# Altium PCB WS_LORA.PcbDoc (part 1 of 2)
Units mm, origin at the board's own origin, x right, y up, seen from the top; angles counter-clockwise.
Board outline 77.7 x 51.7 mm, 2 copper layers (Top Layer, Top, Bottom Layer, Bottom), stack 1.571 mm thick; 79 components, 51 nets, 236 pads, 108 vias.
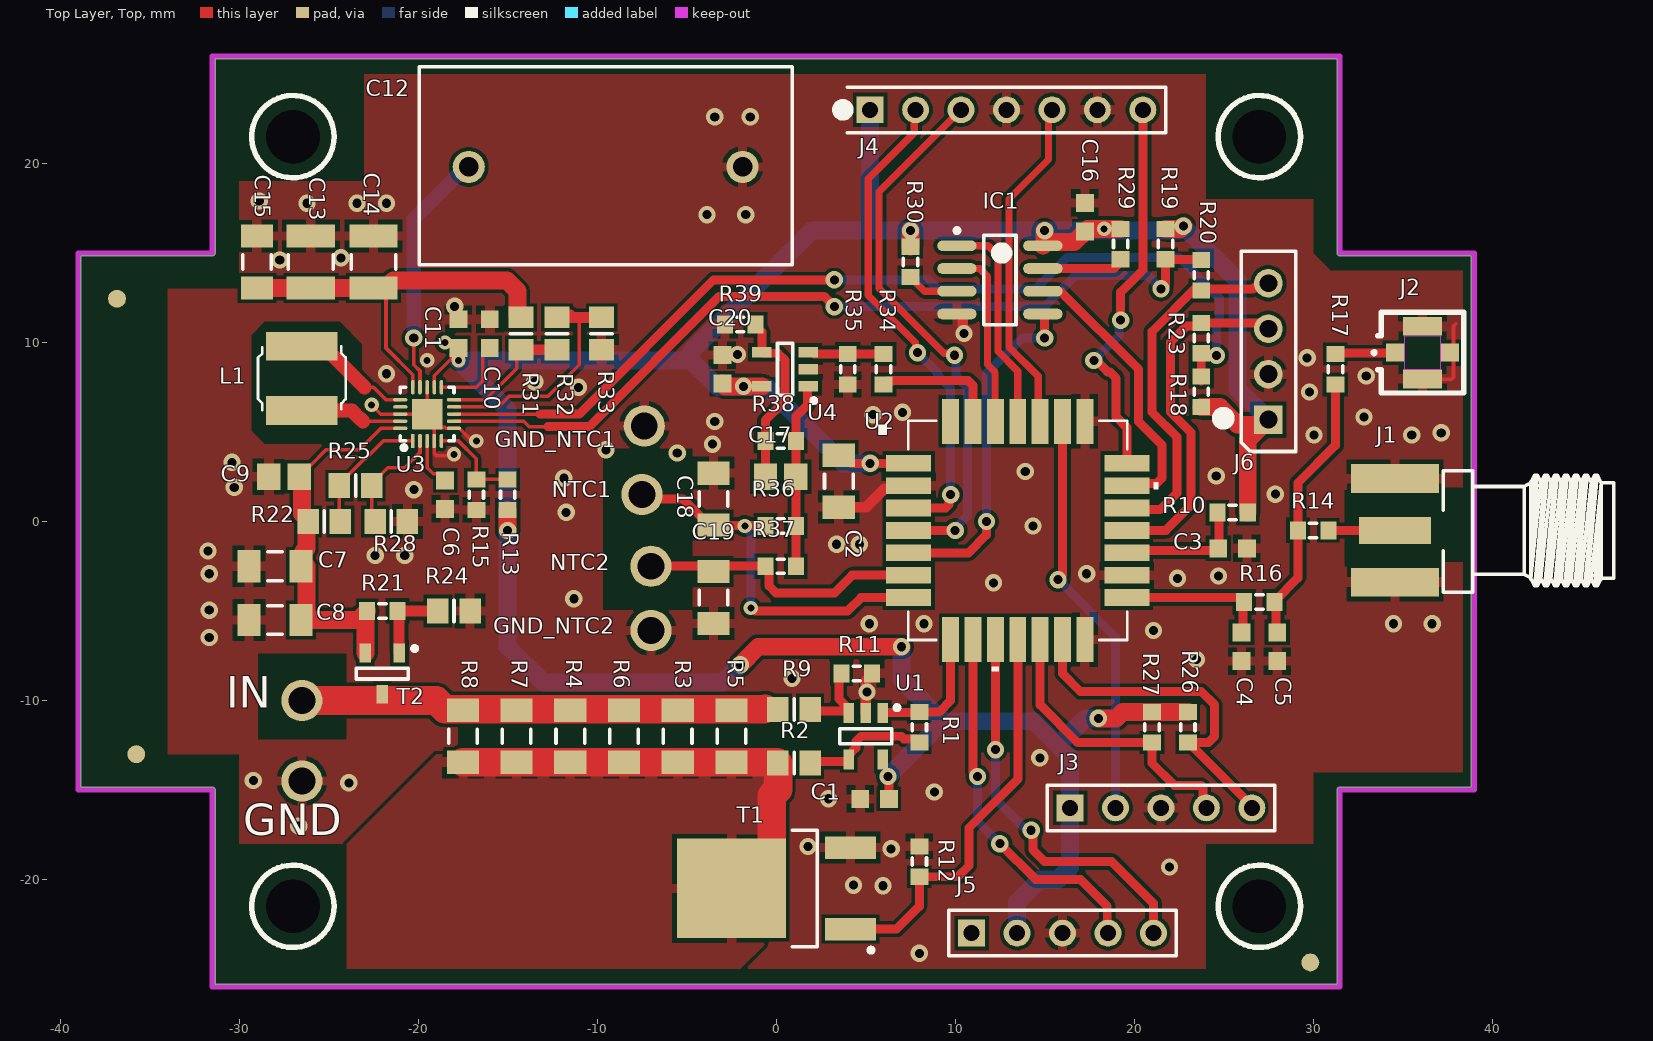
[diagram p0: Top Layer, Top view]
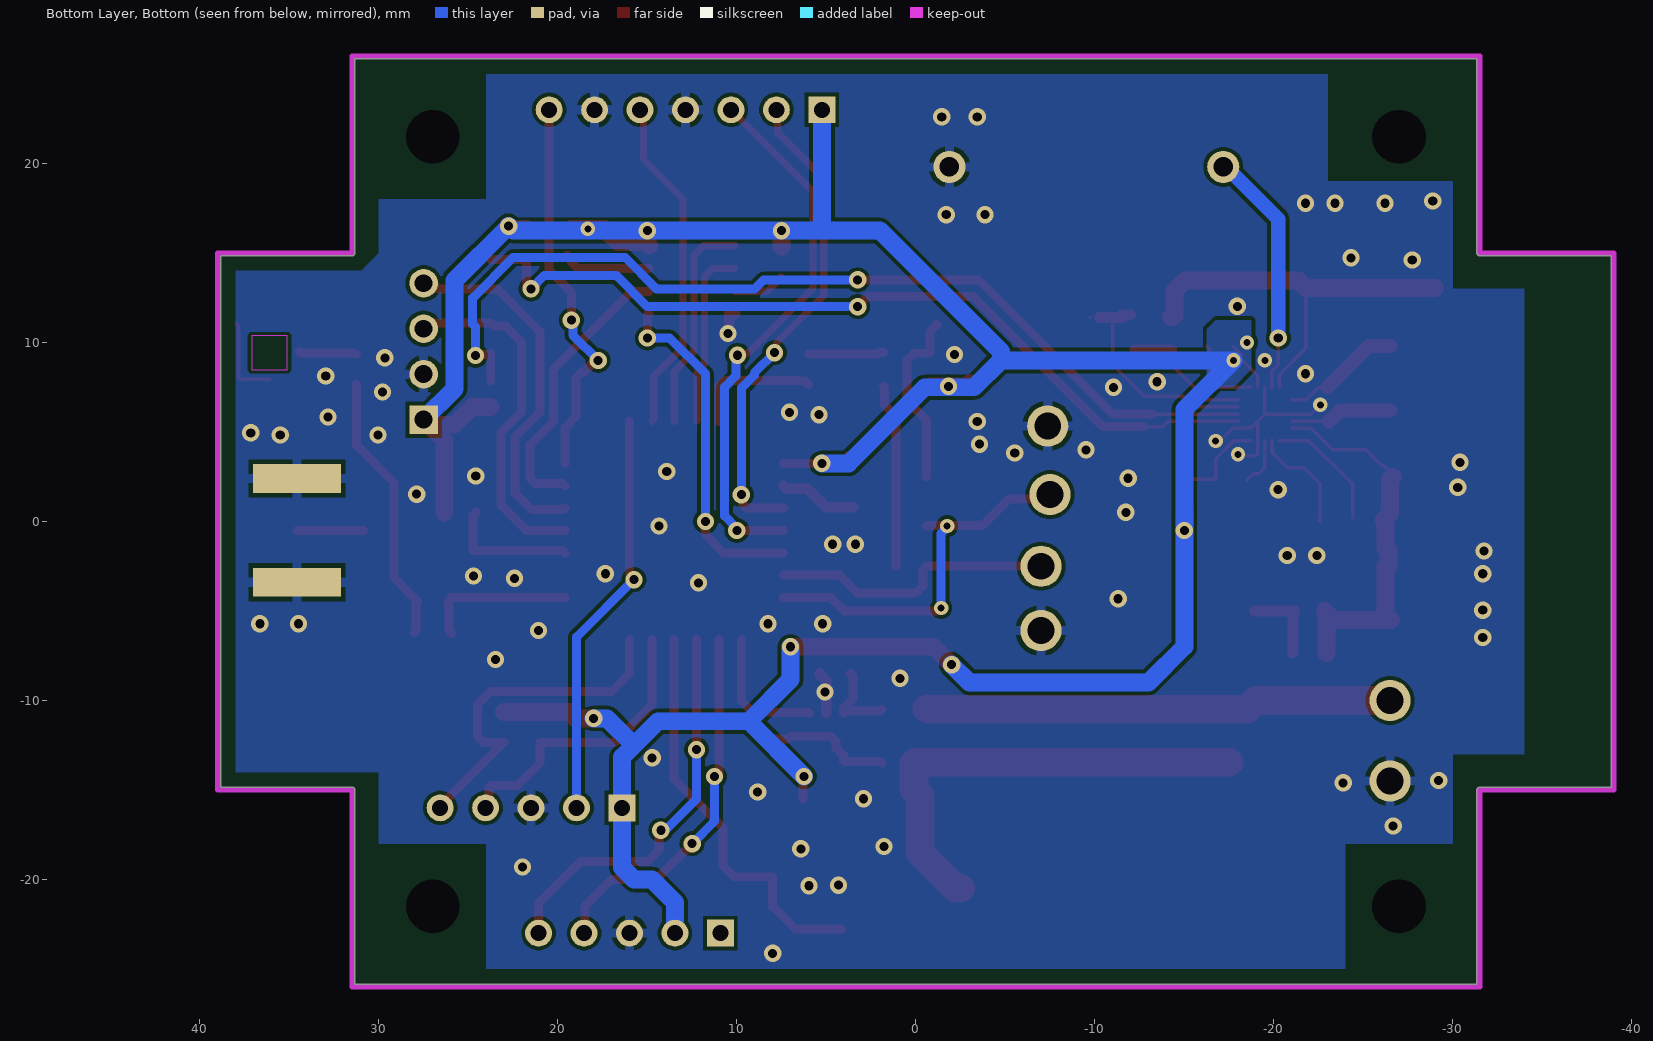
[diagram p1: Bottom Layer, Bottom view, seen from below]

## Layer stack, top to bottom
Top Solder, Top Mask: solder mask 0.0102, Solder Resist, Dk 3.5
Top Layer, Top: signal copper 0.0356
Dielectric 1: dielectric 1.5, FR-4, Dk 4.8
Bottom Layer, Bottom: signal copper 0.0356
Bottom Solder, Bot Mask: solder mask 0.0102, Solder Resist, Dk 3.5

## Board outline
-31.5,-14.85 cw(c-31.5,-15) -31.35,-15 -31.35,-25.85 31.35,-25.85 31.35,-15 cw(c31.5,-15) 31.5,-14.85 38.85,-14.85 38.85,14.85 31.5,14.85 cw(c31.5,15) 31.35,15 31.35,25.85 -31.35,25.85 -31.35,15 cw(c-31.5,15) -31.5,14.85 -38.85,14.85 -38.85,-14.85

## Design rules (kind name [scope] priority, off if disabled: settings)
Clearance [All] p1: gap=0.2 ignorepadtopadclearanceinfootprint=FALSE
PlaneClearance [All] p1: clearance=0.254
PolygonConnect [All] p1: thpad.connectstyle=Relief thpad.reliefconductorwidth=0.54 thpad.reliefentries=4 thpad.polygonreliefangle="90 Angle" thpad.airgapwidth=0.254 smdpad.connectstyle=Relief smdpad.reliefconductorwidth=0.54 smdpad.reliefentries=4 smdpad.polygonreliefangle="90 Angle" smdpad.airgapwidth=0.254 via.connectstyle=Direct via.reliefconductorwidth=0.254 via.reliefentries=4 via.polygonreliefangle="90 Angle" via.airgapwidth=0.254
RoutingVias [All] p1: holewidth=1 width=1 viastyle="Through Hole" minholewidth=0.35 minwidth=0.8 maxholewidth=0.711 maxwidth=1.27
SilkToSilkClearance [All] p1: silktosilkclearance=0.1
SilkToSolderMaskClearance [IsPad] p1: minsilkscreentomaskgap=0.08 clearancetoexposedcopper=TRUE
SolderMaskExpansion [All] p1: expansion=0.102 istentingtop=FALSE
SupplyNets "Schematic Supply Nets_1" [InNet('3.3V')] p1: voltage=0.000
SupplyNets "Schematic Supply Nets" [InNet('GND')] p2: voltage=0.000
Width [All] p1: maxlimit=7.62 minlimit=0.2 preferedwidth=0.381
27 further rules are at their usual default settings.

## Components (designator, comment, footprint, x,y, rotation, side; value= is the part's Value field where it differs from the comment)
C1 "100nF" CAPC1608N 5.5,-15.5 r0 top
C2 "4.7uF" CAPC3216N 3.5,2.25 r90 top
C3 "100nF" CAPC1608N 25.5,-1.5 r180 top
C4 "N.M" CAPC1608N 26,-7 r90 top
C5 "N.M" CAPC1608N 28,-7 r90 top
C6 "10nF" CAPC1608N -18.5,1.5 r270 top
C7 "4.7uF" CAPC3216N -28,-2.5 r0 top
C8 "4.7uF" CAPC3216N -28,-5.5 r0 top
C9 "N.M." CAPC2012N -27.5,2.5 r0 top
C10 "100nF" CAPC1608N -16,10.5 r270 top
C11 "100nF" CAPC1608N -17.75,10.5 r270 top
C12 "5F" CAPR1530x1050X2050X2800 -9.525,19.812 r0 top
C13 "22uF" CAPC3225N -26,14.5 r270 top
C14 "22uF" CAPC3225N -22.5,14.5 r270 top
C15 "4.7uF" CAPC3216N -29,14.5 r270 top
C16 "100nF" CAPC1608N 17.25,17 r270 top
C17 "N.M." CAPC2012N 0.25,2.5 r0 top
C18 "4.7uF" CAPC3216N -3.5,1.25 r270 top
C19 "4.7uF" CAPC3216N -3.5,-4.25 r90 top
C20 "100nF" CAPC1608N -3,8.5 r270 top
GND "" PIN_1.5MM_HOLE -26.5,-14.5 r0 top
GND_NTC1 "" PIN_1.5MM_HOLE -7.366,5.334 r0 top
GND_NTC2 "" PIN_1.5MM_HOLE -6.985,-6.096 r0 top
IC1 "W25Q64JVSSIQ" SOIC127P600-8N 12.5,13.5 r0 top
IN "" PIN_1.5MM_HOLE -26.5,-10 r0 top
J1 "SMA JACJK_EDGE_female" "Adam Tech_RF2-143-T-17-50-G" 36,-0.5 r180 top
J2 "U.FL-JACK_male" LINX_CONMHF1-SMD-T 36.112,9.431 r90 top
J3 "HEADER 1X5" HDR1X5 21.5,-16 r0 top
J4 "HEADER 1X7" HDR1X7 5.25,23 r0 top
J5 "HEADER 1X5" HDR1X5 16,-23 r0 top
J6 "Header Female" HARWIN_M20-7820442 27.5,9.5 r90 top
L1 "22uH" IND_Taiyo_NRS5024 -26.5,8 r90 top
NTC1 "" PIN_1.5MM_HOLE -7.5,1.5 r0 top
NTC2 "" PIN_1.5MM_HOLE -7,-2.5 r0 top
R1 "49K9" RESC1608N(0603) 8,-11.5 r90 top
R2 "4K99" RESC2012N(0805) 1,-13.5 r0 top
R3 "1R" RESC3216N(1206) -5.5,-12 r270 top
R4 "1R" RESC3216N(1206) -11.5,-12 r270 top
R5 "1R" RESC3216N(1206) -2.5,-12 r270 top
R6 "1R" RESC3216N(1206) -8.5,-12 r270 top
R7 "1R" RESC3216N(1206) -14.5,-12 r270 top
R8 "1R" RESC3216N(1206) -17.5,-12 r270 top
R9 "4K99" RESC2012N(0805) 1,-10.5 r0 top
R10 "N.M." RESC1608N(0603) 25.5,0.5 r0 top
R11 "49K9" RESC1608N(0603) 4.5,-8.5 r180 top
R12 "N.M." RESC1608N(0603) 8,-19 r270 top
R13 "N.M." RESC1608N(0603) -15,1.5 r270 top
R14 "0R" RESC1608N(0603) 30,-0.5 r0 top
R15 "N.M." RESC1608N(0603) -16.75,1.5 r90 top
R16 "0R" RESC1608N(0603) 27,-4.5 r0 top
R17 "N.M." RESC1608N(0603) 31.25,8.5 r90 top
R18 "N.M." RESC1608N(0603) 23.75,7.25 r270 top
R19 "N.M." RESC1608N(0603) 21.75,15.5 r90 top
R20 "0R" RESC1608N(0603) 23.75,13.75 r270 top
R21 "N.M." RESC1608N(0603) -22,-5 r180 top
R22 "10M" RESC2012N(0805) -25.25,0 r180 top
R23 "0R" RESC1608N(0603) 23.75,10.25 r90 top
R24 "4K99" RESC2012N(0805) -18,-5 r180 top
R25 "1M" RESC2012N(0805) -23.5,2 r180 top
R26 "N.M." RESC1608N(0603) 23,-11.5 r90 top
R27 "N.M." RESC1608N(0603) 21,-11.5 r90 top
R28 "5M6" RESC2012N(0805) -21.5,0 r180 top
R29 "N.M." RESC1608N(0603) 19.25,15.5 r90 top
R30 "N.M." RESC1608N(0603) 7.5,14.5 r90 top
R31 "6M2" RESC2012N(0805) -14.25,10.5 r90 top
R32 "499K" RESC2012N(0805) -12.25,10.5 r270 top
R33 "2M7" RESC2012N(0805) -9.75,10.5 r90 top
R34 "49K9" RESC1608N(0603) 6,8.5 r270 top
R35 "49K9" RESC1608N(0603) 4,8.5 r90 top
R36 "N.M." RESC1608N(0603) 0.25,-0.25 r0 top
R37 "N.M." RESC1608N(0603) 0.25,-2.5 r0 top
R38 "49K9" RESC1608N(0603) 0.25,4.5 r0 top
R39 "49K9" RESC1608N(0603) -2,11 r0 top
T1 "IRLR8726PBF" TO228P991X239-3N-R546X521 0,-20.5 r180 top
T2 "AP2311GN-HF-3TR" SOT95P240X130-3N -22,-8.5 r270 top
U1 "TLV333IDBVR" SOT95P280X145-5N 5,-12 r270 top
U2 "114993121" QFN_90687_SEE-L 13.5,-0.5 r0 top
U3 "SPV1050TTR" QFN40P300X300X100-21N -19.5,6 r90 top
U4 "MCP6071T-E/OT" SOT95P280X145-5N 0.5,8.5 r180 top

## Footprints (in the part's own frame and the unit in brackets; to place one, negate y for a bottom-side part, rotate by r counter-clockwise, add the part's x,y. Pads: shape width x height; smd on the part's side, far side on the other; paste and mask are expansions set on the pad)
"Adam Tech_RF2-143-T-17-50-G" [mm] "SMA End Launch Jack for 1.58mm PCB, 50 Ohm, Flat Tab Contact"
  rect 4x1.5 smd: 1(1.425,0)
  rect 4.9x1.6 smd: 2(1.425,2.9) 2(1.425,-2.9)
  rect 4.9x1.6 smd far side: 2(1.425,2.9) 2(1.425,-2.9)
  silkscreen extent -10.81,-3.34 -1.28,3.46, body extent -11.06,-3.18 2.25,3.18, height 3.57
CAPC1608N [mm] "Chip Capacitor, Body 1.6x0.8mm, IPC Medium Density"
  rect 1x1 smd: 1(-0.8,0) 2(0.8,0)
  body extent -0.87,-0.48 0.87,0.48, height 0.85
CAPC2012N [mm] "Chip Capacitor, Body 2.0x1.3mm, IPC Medium Density"
  rect 1.3x1.5 smd: 1(-0.85,0) 2(0.85,0)
  body extent -1.1,-0.72 1.1,0.72, height 1.1
CAPC3216N [mm] "Chip Capacitor, Body 3.2x1.6mm, IPC Medium Density"
  rect 1.3x1.8 smd: 1(-1.45,0) 2(1.45,0)
  silkscreen extent -0.4,-0.8 0.4,0.8, body extent -1.7,-0.9 1.7,0.9, height 1.35
CAPC3225N [mm] "Chip Capacitor, Body 3.2x2.5mm, IPC Medium Density"
  rect 1.3x2.7 smd: 1(-1.45,0) 2(1.45,0)
  silkscreen extent -0.4,-1.25 0.4,1.25, body extent -1.7,-1.35 1.7,1.35, height 1.35
CAPR1530x1050X2050X2800 [mm] "Capacitor Radial, Pin spacing 15.0mm - Body Width 9mm X Body Length 18mm X Body Height 17.5mm"
  round 1.8 hole 1.1: 1(-7.65,0) 2(7.65,0)
  silkscreen extent -10.41,-5.46 10.41,5.59, body extent -10.25,-5.17 10.25,5.33, height 27.5
HARWIN_M20-7820442 [mm] "4-Contacts - Pitch 2.54mm - Single Row  Through Mount Header  Socket Total Height 8.64mm"
  rect 1.6x1.6 hole 1: 1(-3.81,0)
  round 1.6 hole 1: 2(-1.27,0) 3(1.27,0) 4(3.81,0)
  silkscreen extent -5.59,-1.52 5.59,2.65, body extent -5.28,-1.25 5.28,1.25, height 8.5
HDR1X5 [mm]
  rect 1.5x1.5 hole 0.9: 1(-5.08,0)
  round 1.5 hole 0.9: 2(-2.54,0) 3(0,0) 4(2.54,0) 5(5.08,0)
  silkscreen extent -6.35,-1.27 6.35,1.27
HDR1X7 [mm]
  rect 1.5x1.5 hole 0.9: 1(0,0)
  round 1.5 hole 0.9: 2(2.54,0) 3(5.08,0) 4(7.62,0) 5(10.16,0) 6(12.7,0) 7(15.24,0)
  silkscreen extent -1.82,-1.27 16.51,1.27
IND_Taiyo_NRS5024 [mm] "Inductor  NRS5024   Series ±20%, 0.82A, 4.9x4.9x2.4mm"
  rect 1.6x4 smd paste-0.152: 1(-1.8,0) 2(1.8,0)
  silkscreen extent -1.77,-2.45 1.77,2.45, body extent -2.45,-2.45 2.45,2.45, height 2.4
LINX_CONMHF1-SMD-T [mm]
  rect 1x1.05 smd: 1(0,1.525) 4(0,-1.525)
  rect 1.05x2.2 smd: 2(1.475,0) 3(-1.475,0)
  Keep-Out Layer, Board region: 0.95,-1 -0.95,-1 -0.95,1 0.95,1
  Keep-Out Layer, Board region: 0.95,-1 -0.95,-1 -0.95,1 0.95,1
  silkscreen extent -2.25,-2.3 2.25,2.8, body extent -1.5,-1.55 1.5,1.55, height 1.31
PIN_1.5MM_HOLE [mm]
  round 2.3 hole 1.5 paste-2539.97: 1(0,0)
QFN40P300X300X100-21N [mm]
  rect 0.8x0.2 smd mask+0.07: 1(-1.5,0.8)
  oval 0.8x0.2 smd mask+0.07: 2(-1.5,0.4) 3(-1.5,0) 4(-1.5,-0.4) 5(-1.5,-0.8) 11(1.5,-0.8) 12(1.5,-0.4) 13(1.5,0) 14(1.5,0.4) 15(1.5,0.8)
  oval 0.2x0.8 smd mask+0.07: 6(-0.8,-1.5) 7(-0.4,-1.5) 8(0,-1.5) 9(0.4,-1.5) 10(0.8,-1.5) 16(0.8,1.5) 17(0.4,1.5) 18(0,1.5) 19(-0.4,1.5) 20(-0.8,1.5)
  rrect4% 1.7x1.7 smd paste-2 mask+0.07: 21(0,0)
  silkscreen extent -2,-1.5 1.5,1.5, body extent -1.5,-1.5 1.5,1.5, height 1
QFN_90687_SEE-L [mil]
  rect 99x37 smd paste+0 mask+0: 1(-240,147.64) 2(-240,98.43) 3(-240,49.21) 4(-240,0) 5(-240,-49.21) 6(-240,-98.43) 7(-240,-147.64) 15(240,-147.64) 16(240,-98.43) 17(240,-49.21) 18(240,0) 19(240,49.21) 20(240,98.43) 21(240,147.64)
  rect 37x99 smd paste+0 mask+0: 8(-147.64,-240) 9(-98.43,-240) 10(-49.21,-240) 11(0,-240) 12(49.21,-240) 13(98.43,-240) 14(147.64,-240) 22(147.64,240) 23(98.43,240) 24(49.21,240) 25(0,240) 26(-49.21,240) 27(-98.43,240) 28(-147.64,240)
  silkscreen extent -241,-310 310,241, body extent -281,-281 281,281, height 98
RESC1608N(0603) [mm] "Chip Resistor, Body 1.6x0.8mm, IPC Medium Density"
  rect 0.9x1 smd: 1(-0.85,0) 2(0.85,0)
  silkscreen extent -0.2,-0.4 0.2,0.4, body extent -0.85,-0.48 0.85,0.48, height 0.6
RESC2012N(0805) [mm] "Chip Resistor, Body 2.0x1.3mm, IPC Medium Density"
  rect 1.2x1.4 smd: 1(-0.9,0) 2(0.9,0)
  silkscreen extent 0,-0.6 0,0.6, body extent -1.07,-0.7 1.07,0.7, height 0.65
RESC3216N(1206) [mm] "Chip Resistor, Body 3.2x1.6mm, IPC Medium Density"
  rect 1.3x1.8 smd: 1(-1.45,0) 2(1.45,0)
  silkscreen extent -0.4,-0.8 0.4,0.8, body extent -1.68,-0.87 1.68,0.87, height 0.71
SOIC127P600-8N [mm] "SOIC, 8-Leads, Body 4.9x3.9mm, Pitch 1.27mm, IPC Medium Density"
  oval 2.2x0.6 smd: 1(-2.4,1.905) 2(-2.4,0.635) 3(-2.4,-0.635) 4(-2.4,-1.905) 5(2.4,-1.905) 6(2.4,-0.635) 7(2.4,0.635) 8(2.4,1.905)
  silkscreen extent -2.52,-2.5 0.9,2.88, body extent -3.1,-2.5 3.1,2.5, height 1.75
SOT95P240X130-3N [mm] "SOT23 3-Leads, Pitch 0.95mm - Body 1.3x2.9mm, IPC Medium Density"
  rect 1.05x0.65 smd: 1(-1.15,0.95) 2(-1.15,-0.95) 3(1.15,0)
  silkscreen extent -1.52,-1.45 0.3,1.92, body extent -1.25,-1.5 1.25,1.5, height 1.3
SOT95P280X145-5N [mm] "SOT, 0.95mm pitch; 5 pin, 1.60mm W X 2.90mm L X 1.45mm H body, IPC Medium Density"
  rect 1.1x0.6 smd: 1(-1.3,0.95) 2(-1.3,0) 3(-1.3,-0.95) 4(1.3,-0.95) 5(1.3,0.95)
  silkscreen extent -1.72,-1.45 0.43,1.88, body extent -1.4,-1.5 1.4,1.5, height 1.45
TO228P991X239-3N-R546X521 [mm] "TO-252AA DPAK TO, 2.28mm pitch; 2 pin,9.905mm L X 6.095mm W X 2.39mm H body, IPC Medium Density"
  rect 2.85x1.25 smd: 1(-4.15,2.28) 2(-4.15,-2.28)
  rect 6.1x5.55 smd: 3(2.5,0)
  silkscreen extent -5.43,-3.25 -0.9,3.57, body extent -4.99,-3.27 4.95,3.27, height 2.28

## Part data
C1 C3 C10 C11 C16 C20: library part CC0603_100NF_50V_10%_X7R, "Non-polarised capacitor", Case=0603, Comment_Ratings="100nF / 50V", Manufacturer=GENERIC, Manufacturer1 ComponentHeight=0.87mm, Manufacturer1 Example=TDK, Manufacturer1 Part Number=C1608X7R1H104K080AA, Tolerance=±10%, Voltage=50V, Author=V.Shishkov, Component Type=Standard, CreateDate=13/07/2015, Elinvent_Num=33-1002-02, HelpURL=\\IDT-SRV102\Bulgaria\Bulgaria\Altium\Datasheets\mlcc_commercial_general_en.pdf, LatestRevisionDate=13/07/2015, Manufacturer Part Number=CC0603_100NF_50V_10%_X7R, Mounted=Yes, Part Description="SMD Multilayer Chip Ceramic Capacitor", Part Number=CC0603_100NF_50V_10%_X7R, Pin Count=2, SMD=Yes, Socket=No, Status=Preferred, Table="Capacitors SMD", TC=X7R
C2 C7 C8 C15 C18 C19: library part CC1206_4.7UF_50V_10%_X7R, "Non-polarised capacitor", Case=1206, Comment_Ratings="4.7uF / 50V", Manufacturer=GENERIC, Manufacturer1 ComponentHeight=1.60mm, Manufacturer1 Example=TDK, Manufacturer1 Part Number=C3216X7R1H475K160AC, Tolerance=±10%, Voltage=50V, Author=V.Shishkov, Component Type=Standard, CreateDate=13/07/2015, Elinvent_Num=33-1058-04, HelpURL=\\IDT-SRV102\Bulgaria\Altium\Datasheets\mlcc_commercial_general_en.pdf, LatestRevisionDate=13/07/2015, Manufacturer Part Number=CC1206_4.7UF_50V_10%_X7R, Mounted=Yes, Part Description="SMD Multilayer Chip Ceramic Capacitor", Part Number=CC1206_4.7UF_50V_10%_X7R, Pin Count=2, SMD=Yes, Socket=No, Status=Preferred, Table="Capacitors SMD", TC=X7R
C4 C5: library part CC0603_NO-VALUE, "Non-polarised capacitor", Case=0603, Manufacturer=GENERIC, Manufacturer1 ComponentHeight=0.87mm, Author=L.K, Comment_Ratings=N.M, Component Type=Standard, CreateDate=15/03/2016, HelpURL=Undefined, LatestRevisionDate=15/03/2016, Manufacturer Part Number=CC0603_NO-VALUE, Mounted=Yes, Part Description="SMD Multilayer Chip Ceramic Capacitor", Part Number=CC0603_NO-VALUE, Pin Count=2, SMD=Yes, Socket=No, Status=Preferred, Table="Capacitors SMD"
C6: library part CC0603_10NF_50V_10%_X7R, "Non-polarised capacitor", Case=0603, Comment_Ratings="10nF / 50V", Manufacturer=GENERIC, Manufacturer1 ComponentHeight=0.87mm, Manufacturer1 Example=TDK, Manufacturer1 Part Number=C1608X7R1H103K080AA, Tolerance=±10%, Voltage=50V, Author=V.Shishkov, Component Type=Standard, CreateDate=13/07/2015, Elinvent_Num=33-1004-02, HelpURL=\\IDT-SRV102\Bulgaria\Altium\Datasheets\mlcc_commercial_general_en.pdf, LatestRevisionDate=13/07/2015, Manufacturer Part Number=CC0603_10NF_50V_10%_X7R, Mounted=Yes, Part Description="SMD Multilayer Chip Ceramic Capacitor", Part Number=CC0603_10NF_50V_10%_X7R, Pin Count=2, SMD=Yes, Socket=No, Status=Preferred, Table="Capacitors SMD", TC=X7R
C9 C17: library part CC0805_NO-VALUE, "Non-polarised capacitor", Case=0805, Manufacturer=Undefined, Manufacturer1 ComponentHeight=1.35mm, Author=V.Shishkov, Comment_Ratings=N.M., Component Type="Standard (No BOM)", CreateDate=13/07/2015, HelpURL=Undefined, LatestRevisionDate=13/07/2015, Manufacturer Part Number=CC0805_NO-VALUE, Mounted=No, Part Description="Reserved Footprint For 0805(2012) Chip Ceramic Capacitor", Part Number=CC0805_NO-VALUE, Pin Count=2, SMD=Yes, Socket=No, Status=None, Table="Capacitors SMD"
C12: library part CAER_5F_5.5V_0%+30%, "Polarised capacitor", Case="LS15.3 D20.5 x T10.5 x H28", Comment_Ratings="5F / 5.5V", Manufacturer="Abracon LLC", Manufacturer Part Number=ADCM-S05R5SA505RB, Tolerance=0%+30%, Voltage=5.5V, Author=L.Karamfilov, Component Type=Standard, ComponentHeight=28mm, CreateDate=16/01/2025, HelpURL=\\IDT-SRV102\Bulgaria\Altium\Datasheets\ADCM-S05R5S.pdf, LatestRevisionDate=07/03/2012, Mounted=Yes, Part Description="5 F (EDLC) Supercapacitor 5.5 V Radial 160mOhm @ 1kHz", Part Number=CAER_5F_5.5V_0%+30%, Pin Count=2, SMD=No, Socket=No, Status=None, Table="Capacitors THD"
C13 C14: library part CC1210_22UF_16V_10%_X7R, "Non-polarised capacitor", Case=1210, Comment_Ratings="22uF / 16V", Manufacturer=GENERIC, Manufacturer1 ComponentHeight=2.50mm, Manufacturer1 Example=TDK, Manufacturer1 Part Number=C3225X7R1C226K250AC, Manufacturer Part Number=CC1210_22UF_10V_10%_X7R, Tolerance=±10%, Voltage=16V, Author=V.Shishkov, Component Type=Standard, CreateDate=13/07/2015, Elinvent_Num=33-1005-05, HelpURL=\\IDT-SRV102\Bulgaria\Altium\Datasheets\mlcc_commercial_general_en.pdf, LatestRevisionDate=13/07/2015, Mounted=Yes, Part Description="SMD Multilayer Chip Ceramic Capacitor", Part Number=CC1210_22UF_16V_10%_X7R, Pin Count=2, SMD=Yes, Socket=No, Status=Preferred, Table="Capacitors SMD", TC=X7R
GND GND_NTC1 GND_NTC2 IN NTC1 NTC2: library part PAD_1.5mm_HOLE, "Through Hole Pad", Author=L.K, Component Type="Standard(No BOM)", ComponentHeight=0mm, CreateDate=05/12/2017, LatestRevisionDate=05/12/2017, Mounted=No, PackageDescription="PAD-1.5MM HOLE_ 2.3 MM  RING", Part Description="Place for CABLE SOLDER", Part Number=PAD_1.5mm_HOLE, Pin Count=1, SMD=No, Socket=No, Status=None
IC1: "FLASH - NOR Memory IC 64Mbit SPI - Quad I/O 133 MHz 8-SOIC", Case=SOIC8, Manufacturer="Winbond Electronics", Author=L.Karamfilov, Component Type=Standard, ComponentHeight=1.75mm, CreateDate=16/01/2025, Device=W25Q64JVSSIQ, HelpURL="\\IDT-SRV102\Bulgaria\Altium\Datasheets\w25q64jv revj 03272018 plus.pdf", LatestRevisionDate=30/11/2015, Manufacturer Part Number=W25Q64JVSSIQ, Mounted=Yes, PackageDescription="SOIC 8, Pitch 1.27mm - Body 4x5mm, IPC Medium Density", Part Description="FLASH - NOR Memory IC 64Mbit SPI - Quad I/O 133 MHz 8-SOIC", Part Number=W25Q64JVSSIQ, Pin Count=8, SMD=Yes, Socket=No, Table=Logic
J1: library part "Adam Tech_RF2-143-T-17-50-G_SMA", Manufacturer="Adam Tech", Manufacturer Part Number=RF2-143-T-17-50-G, Author=L.KARAMFILOV, Component Type=Standard, ComponentHeight=3.54mm, CreateDate=28/02/2025, Device="SMA JACJK_EDGE_female", Family=RF, HelpURL=\\IDT-SRV102\Bulgaria\Altium\Datasheets\rf2-143-t-17-50-g-data-sheet.pdf, LatestRevisionDate=22/07/2015, Mounted=Yes, Part Description="SMA Connector Jack, Female Socket 50 Ohms Board Edge, End Launch Solder", Part Number="Adam Tech_RF2-143-T-17-50-G_SMA", Pin Count=5, SMD=Yes, Socket=No, Status=None, Table=Miscellaneous
J2: library part "TE Connectivity_CONMHF1-SMD-T_U.FL", Manufacturer="TE Connectivity Linx", Manufacturer Part Number=CONMHF1-SMD-T, Author=L.KARAMFILOV, Component Type=Standard, ComponentHeight=1.25mm, CreateDate=28/02/2025, Device=U.FL-JACK_male, Family=U.FL-Type, HelpURL=\\IDT-SRV102\Bulgaria\Altium\Datasheets\ENG_DS_conmhf1-smd-g-t-ds_A1.pdf, LatestRevisionDate=22/07/2015, Mounted=Yes, Part Description="U.FL (UMCC) Connector Jack, Male Pin 50 Ohms Surface Mount Solder", Part Number="TE Connectivity_CONMHF1-SMD-T_U.FL", Pin Count=4, SMD=Yes, Socket=No, Status=None, Table=Miscellaneous
J3 J5: library part "HEADER 1 X 5_2.54MM", "Connector 5 Male", Manufacturer Part Number="DO NOT MOUNT", Author=L.K, Component Type=Standard, CreateDate=05/04/2016, Device="HEADER 1X5", LatestRevisionDate=05/04/2016, Mounted=No, Part Description="5 Contacts - Pitch 2.54mm", Part Number="HEADER 1 X 5_2.54MM", Pin Count=5, SMD=No, Socket=No, Status=None, Table=Miscellaneous
J4: library part "HEADER 1 X 7_2.54MM", "Connector 7 Male", Manufacturer Part Number="DO NOT MOUNT", Author=L.K, Component Type=Standard, CreateDate=16/06/2022, Device="HEADER 1X7", LatestRevisionDate=05/04/2016, Mounted=No, Part Description="7 Contacts - Pitch 2.54mm", Part Number="HEADER 1 X 7_2.54MM", Pin Count=7, SMD=No, Socket=No, Status=None, Table=Miscellaneous
J6: library part M20-7820442, "Connector 4 Female", Manufacturer=HARWIN, Author=L.KARAMFILOV, Component Type=Standard, ComponentHeight=8.64mm, CreateDate=20/10/2015, Device="Header Female", Elinvent_Num=38-2064-01, Family=M20-782, HelpURL=\\IDT-SRV102\Bulgaria\Altium\Datasheets\M20-782.pdf, LatestRevisionDate=20/10/2015, Manufacturer Part Number=M20-7820442, Mounted=Yes, Part Description="4 Contacts - 	Connector  Receptacle 4 Position 0.100\" (2.54mm) Gold Through ole single row", Part Number=M20-7820442, Pin Count=4, SMD=No, Socket=No, Status=None, Table=Miscellaneous
L1: library part IND_22UH_20%_Taiyo-Yuden_NRS5024T220MMGJV, "Inductor", Case=NRS5024, Comment_Ratings="22uH / 0.82A", Manufacturer="Taiyo Yuden", Manufacturer Part Number=NRS5024T220MMGJV, Power=820mA, Resistance=0.276R, Tolerance=±20%, Author=L.KARAMFILOV, Component Type=Standard, ComponentHeight=3.2mm, CreateDate=07/03/2025, HelpURL=\\IDT-SRV102\Bulgaria\Altium\Datasheets\NRS5024T220MMGJV_SS.pdf, LatestRevisionDate=05/12/2017, Mounted=Yes, Part Description="22 µH Shielded Drum Core, Wirewound Inductor 820 mA 276mOhm Max Nonstandard", Part Number=IND_22UH_20%_Taiyo-Yuden_NRS5024T220MMGJV, Pin Count=2, SMD=Yes, Socket=No, Table="Inductors SMD"
R1 R11 R34 R35 R38 R39: library part R0603_49K9_1%_0.1W_100PPM, "Resistor-1%", Case=0603, Comment_Ratings="49K9 / 0.1W", Manufacturer=GENERIC, Manufacturer1 ComponentHeight=0.55mm, Manufacturer1 Example="YAGEO PHYCOMP", Manufacturer1 Part Number=RC0603FR-0749K9L, Power=0.1W, Tolerance=±1%, Author=L.KARAMFILOV, Component Type=Standard, ComponentHeight=0.45±0.10mm, CreateDate=01/09/2016, HelpURL=\\IDT-SRV102\Bulgaria\Altium\Datasheets\PYu-RC_Group_51_RoHS_L_2.pdf, LatestRevisionDate=01/09/2016, Manufacturer Part Number=R0603_49K9_1%_0.1W_100PPM, Mounted=Yes, Part Description="General Purpose Thick Film Chip Resistor", Part Number=R0603_49K9_1%_0.1W_100PPM, Pin Count=2, SMD=Yes, Socket=No, Status=Preferred, Table="Resistors SMD", TC=±100ppm/°C
R2 R9 R24: library part R0805_4K99_1%_0.125W_100PPM, "Resistor-1%", Case=0805, Comment_Ratings="4K99 / 0.125W", Manufacturer="Vishay Dale", Manufacturer1 ComponentHeight=0.5mm, Manufacturer1 Example=VISHAY, Manufacturer1 Part Number=CRCW08054K99FKEA, Power=0.125W, Tolerance=±1%, Author=L.KARAMFILOV, Component Type=Standard, ComponentHeight=0.50±0.10mm, CreateDate=07/03/2025, HelpURL="\\IDT-SRV102\Bulgaria\Altium\Datasheets\dcrcwe3 (1).pdf", LatestRevisionDate=19/12/2016, Manufacturer Part Number=R0805_4K99_1%_0.125W_100PPM, Mounted=Yes, Part Description="General Purpose Thick Film Chip Resistor", Part Number=R0805_4K99_1%_0.125W_100PPM, Pin Count=2, SMD=Yes, Socket=No, Status=Preferred, Table="Resistors SMD", TC=±100ppm/°C
R3 R4 R5 R6 R7 R8: library part R1206_1R_0.5%_0.52W_25PPM, "Resistor-0.1%", Case=1206, Comment_Ratings="1R / 0.52W / 25PPM", Manufacturer=YAGEO, Manufacturer1 ComponentHeight=TNPW12061R00DEEA, Manufacturer1 Example=VISHAY, Manufacturer1 Part Number="RES 1 OHM 0.5% 0.52W 1206", Power=0.25W, Tolerance=±0.5%, Author=L.KARAMFILOV, Component Type=Standard, ComponentHeight=0.55±0.10mm, CreateDate=29/07/2015, HelpURL=\\IDT-SRV102\Bulgaria\Altium\Datasheets\recsoldpaddims-drabeyresfus.pdf, LatestRevisionDate=29/07/2015, Manufacturer Part Number=TNPW12061R00DEEA, Mounted=Yes, Part Description="1 Ohms ±0.5% 0.52W Chip Resistor 1206 (3216 Metric) Anti-Sulfur, Automotive AEC-Q200, Moisture Resistant Thin Film", Part Number=R1206_1R_0.5%_0.52W_25PPM, Pin Count=2, SMD=Yes, Socket=No, Status=Preferred, Table="Resistors SMD", TC=±25ppm/°C
R10 R12 R13 R15 R17 R18 R19 R21 R26 R27 R29 R30 R36 R37: library part R0603_NO-VALUE, "Resistor", Case=0603, Manufacturer=Undefined, Author=L.KARAMFILOV, Comment_Ratings=N.M., Component Type="Standard (No BOM)", ComponentHeight=0.45±0.10mm, CreateDate=10/07/2015, HelpURL=\\IDT-SRV102\Bulgaria\Altium\Datasheets\.pdf, LatestRevisionDate=10/07/2015, Manufacturer1 ComponentHeight=Undefined, Manufacturer1 Example=Undefined, Manufacturer1 Part Number=Undefined, Manufacturer Part Number=R0603_NO-VALUE, Mounted=No, Part Description="Reserved Footprint For a 0603 (1608) Chip Resistor", Part Number=R0603_NO-VALUE, Pin Count=2, SMD=Yes, Socket=No, Status=None, Table="Resistors SMD"
R14 R16 R20 R23: library part R0603_0R_JUMPER, "Resistor", Case=0603, Comment_Ratings="0R / 1A Max", Manufacturer=GENERIC, Manufacturer1 ComponentHeight=0.55mm, Manufacturer1 Example="YAGEO PHYCOMP", Manufacturer1 Part Number=RC0603JR-070RL, Author=L.KARAMFILOV, Component Type=Standard, ComponentHeight=0.45±0.10mm, CreateDate=10/07/2015, Elinvent_Num=36-1001-03, HelpURL=\\IDT-SRV102\Bulgaria\Altium\Datasheets\RC0603_V5.pdf, LatestRevisionDate=10/07/2015, Manufacturer Part Number=R0603_0R_JUMPER, Mounted=Yes, Part Description="1A (0.05R Max DC Resistance) Zero Ohm Jumper", Part Number=R0603_0R_JUMPER, Pin Count=2, SMD=Yes, Socket=No, Status=Preferred, Table="Resistors SMD"
R22: library part R0805_10M_1%_0.125W_100PPM, "Resistor-1%", Case=0805, Comment_Ratings="10M / 0.125W", Manufacturer="Vishay Dale", Manufacturer1 ComponentHeight=0.5mm, Manufacturer1 Example=VISHAY, Manufacturer1 Part Number=CRCW080510M00FKEA, Power=0.125W, Tolerance=±1%, Author=L.KARAMFILOV, Component Type=Standard, ComponentHeight=0.50±0.10mm, CreateDate=07/03/2025, HelpURL="\\IDT-SRV102\Bulgaria\Altium\Datasheets\dcrcwe3 (1).pdf", LatestRevisionDate=19/12/2016, Manufacturer Part Number=R0805_10M_1%_0.125W_100PPM, Mounted=Yes, Part Description="General Purpose Thick Film Chip Resistor", Part Number=R0805_10M_1%_0.125W_100PPM, Pin Count=2, SMD=Yes, Socket=No, Status=Preferred, Table="Resistors SMD", TC=±100ppm/°C
R25: library part R0805_1M_1%_0.125W_100PPM, "Resistor-1%", Case=0805, Comment_Ratings="1M / 0.125W", Manufacturer="Vishay Dale", Manufacturer1 ComponentHeight=0.5mm, Manufacturer1 Example=VISHAY, Manufacturer1 Part Number=CRCW08051M00FKEA, Power=0.125W, Tolerance=±1%, Author=L.KARAMFILOV, Component Type=Standard, ComponentHeight=0.50±0.10mm, CreateDate=07/03/2025, HelpURL="\\IDT-SRV102\Bulgaria\Altium\Datasheets\dcrcwe3 (1).pdf", LatestRevisionDate=19/12/2016, Manufacturer Part Number=R0805_1M_1%_0.125W_100PPM, Mounted=Yes, Part Description="General Purpose Thick Film Chip Resistor", Part Number=R0805_1M_1%_0.125W_100PPM, Pin Count=2, SMD=Yes, Socket=No, Status=Preferred, Table="Resistors SMD", TC=±100ppm/°C
R28: library part R0805_5M6_1%_0.125W_100PPM, "Resistor-1%", Case=0805, Comment_Ratings="5M6 / 0.125W", Manufacturer="Vishay Dale", Manufacturer1 ComponentHeight=0.5mm, Manufacturer1 Example=VISHAY, Manufacturer1 Part Number=CRCW08055M60FKEA, Power=0.125W, Tolerance=±1%, Author=L.KARAMFILOV, Component Type=Standard, ComponentHeight=0.50±0.10mm, CreateDate=07/03/2025, HelpURL="\\IDT-SRV102\Bulgaria\Altium\Datasheets\dcrcwe3 (1).pdf", LatestRevisionDate=19/12/2016, Manufacturer Part Number=R0805_5M6_1%_0.125W_100PPM, Mounted=Yes, Part Description="General Purpose Thick Film Chip Resistor", Part Number=R0805_5M6_1%_0.125W_100PPM, Pin Count=2, SMD=Yes, Socket=No, Status=Preferred, Table="Resistors SMD", TC=±100ppm/°C
R31: library part R0805_6M2_1%_0.125W_100PPM, "Resistor-1%", Case=0805, Comment_Ratings="6M2 / 0.125W", Manufacturer="Vishay Dale", Manufacturer1 ComponentHeight=0.5mm, Manufacturer1 Example=VISHAY, Manufacturer1 Part Number=CRCW08056M20FKEA, Power=0.125W, Tolerance=±1%, Author=L.KARAMFILOV, Component Type=Standard, ComponentHeight=0.50±0.10mm, CreateDate=07/03/2025, HelpURL="\\IDT-SRV102\Bulgaria\Altium\Datasheets\dcrcwe3 (1).pdf", LatestRevisionDate=19/12/2016, Manufacturer Part Number=R0805_6M2_1%_0.125W_100PPM, Mounted=Yes, Part Description="General Purpose Thick Film Chip Resistor", Part Number=R0805_6M2_1%_0.125W_100PPM, Pin Count=2, SMD=Yes, Socket=No, Status=Preferred, Table="Resistors SMD", TC=±100ppm/°C
R32: library part R0805_499K_1%_0.125W_100PPM, "Resistor-1%", Case=0805, Comment_Ratings="499K / 0.125W", Manufacturer=GENERIC, Manufacturer1 ComponentHeight=0.65mm, Manufacturer1 Example="YAGEO PHYCOMP", Manufacturer1 Part Number=RC0805FR-07499KL, Power=0.125W, Tolerance=±1%, Author=L.KARAMFILOV, Component Type=Standard, ComponentHeight=0.55±0.10mm, CreateDate=09/05/2017, Elinvent_Num=36-1101-05, HelpURL=\\IDT-SRV102\Bulgaria\Altium\Datasheets\PYu-R_INT-thick_7.pdf, LatestRevisionDate=09/05/2017, Manufacturer Part Number=R0805_499K_1%_0.125W_100PPM, Mounted=Yes, Part Description="Commercial Thin Film Resistor, Surface Mount Chip", Part Number=R0805_499K_1%_0.125W_100PPM, Pin Count=2, SMD=Yes, Socket=No, Status=Preferred, Table="Resistors SMD", TC=±100ppm/°C
R33: library part R0805_2M7_1%_0.125W_100PPM, "Resistor-1%", Case=0805, Comment_Ratings="2M7 / 0.125W", Manufacturer="Vishay Dale", Manufacturer1 ComponentHeight=0.5mm, Manufacturer1 Example=VISHAY, Manufacturer1 Part Number=CRCW08052M70FKEA, Power=0.125W, Tolerance=±1%, Author=L.KARAMFILOV, Component Type=Standard, ComponentHeight=0.50±0.10mm, CreateDate=07/03/2025, HelpURL="\\IDT-SRV102\Bulgaria\Altium\Datasheets\dcrcwe3 (1).pdf", LatestRevisionDate=19/12/2016, Manufacturer Part Number=R0805_2M7_1%_0.125W_100PPM, Mounted=Yes, Part Description="General Purpose Thick Film Chip Resistor", Part Number=R0805_2M7_1%_0.125W_100PPM, Pin Count=2, SMD=Yes, Socket=No, Status=Preferred, Table="Resistors SMD", TC=±100ppm/°C
T1: "N-channel FET transistor in SOT-23", Case=TO252-AA, Comment_Ratings="Vds=30V / Id=86A", Manufacturer="INFINEON TECHNOLOGIES", Author=L.Karmafilov, Component Type=Standard, ComponentHeight=2.39mm, CreateDate=19/01/2017, Device=IRLR8726PBF, Elinvent_Num=40-1070-00, HelpURL=\\IDT-SRV102\Bulgaria\Altium\Datasheets\irlr8726pbf.pdf, LatestRevisionDate=19/01/2017, Manufacturer Part Number=IRLR8726PBF, Mounted=Yes, PackageDescription="TO-252AA DPAK TO, 2.28mm pitch; 2 pin,9.905mm L X 6.095mm W X 2.39mm H body, IPC Medium Density", Part Description="MOSFET N-CH 30V 86A DPAK", Part Number=IRLR8726PBF, Pin Count=3, SMD=Yes, Socket=No, Table=Transistors
T2: "P-channel FET transistor in SOT-23", Case=SOT23-2, Comment_Ratings="Vds=60V / Id=1.8A", Manufacturer="ADVANCED POWER ELECTR. CO", Author=L.Karmafilov, Component Type=Standard, ComponentHeight=1.11mm, CreateDate=09/03/2025, Device=AP2311GN-HF-3TR, HelpURL=\\IDT-SRV102\Bulgaria\Altium\Datasheets\AP2311GN-3.pdf, LatestRevisionDate=22/12/2015, Manufacturer Part Number=AP2311GN-HF-3TR, Mounted=Yes, PackageDescription="SOT23 3-Leads, Pitch 0.95mm - Body 1.3x2.9mm, IPC Medium Density", Part Description="PMOS 60V 1.8A 1.38W 250mOhm/10V; 300mOhm/4.5V", Part Number=AP2311GN-HF-3TR, Pin Count=3, SMD=Yes, Socket=No, Table=Transistors
U1: "Single Op Amp in SOT23/5", Case=SOT23-5, Manufacturer="TEXAS INSTRUMENTS", Author=L.Karamfilov, Component Type=Standard, ComponentHeight=1.75mm, CreateDate=04/03/2025, Device=TLV333IDBVR, HelpURL=\\IDT-SRV102\Bulgaria\Altium\Datasheets\tlv333.pdf, LatestRevisionDate=19/05/2010, Manufacturer Part Number=TLV333IDBVR, Mounted=Yes, PackageDescription="SOT23-5, 0.95mm pitch; 5 pin, 1.60mm W X 2.90mm L X 1.45mm H body, IPC Medium", Part Description="Zero-Drift Amplifier 1 Circuit Rail-to-Rail SOT-23-5", Part Number=TLV333IDBVR, Pin Count=5, SMD=Yes, Socket=No, Table="Operational Amplifiers"
U2: library part 114993121_RF_SEED, "WIO-E5-LE WIRELESS MODULE (TAPE)", Manufacturer="Seeed Technology Co., Ltd", Mfr_Name=BeagleBoard, Author=L.Karamfilov, Component Type=Standard, ComponentHeight=2.5mm, CreateDate=16/01/2025, Device=114993121, HelpURL="\\IDT-SRV102\Bulgaria\Altium\Datasheets\Wio-E5-LE module datasheet_v1.0.pdf", LatestRevisionDate=07/11/2017, Manufacturer Part Number=114993121, Mounted=Yes, PackageDescription="28-SMD Module", Part Description="General ISM < 1GHz LoRaWAN Transceiver Module 868MHz, 915MHz Antenna Not Included Surface Mount", Part Number=114993121_RF_SEED, Pin Count=28, RefDes=RefDes, SMD=Yes, Socket=No, Table="PCB Modules", Type=Type
U3: "Charger IC Multi-Chemistry 20-VFQFPN (3x3)", Case=20-VFQFN, Manufacturer=STMicroelectronics, Package="VFQFN-20 STMicroelectronics", Author=L.Karamfilov, Check_prices=https://www.snapeda.com/parts/SPV1050TTR/STMicroelectronics/view-part/?ref=eda, Component Type=Standard, ComponentHeight=0.75mm, CreateDate=16/01/2025, Device=SPV1050TTR, HelpURL=\\IDT-SRV102\Bulgaria\Altium\Datasheets\en.DM00100984.pdf, LatestRevisionDate=01/06/2018, Manufacturer Part Number=SPV1050TTR, MF=STMicroelectronics, Mounted=Yes, MP=SPV1050TTR, PackageDescription="20-VFQFN Exposed Pad(3mm × 3mm)", Part Description="IC BATT CHG MULTI-CHEM 20VFQFPN", Part Number=SPV1050TTR, Pin Count=21, SMD=Yes, SnapEDA_Link=https://www.snapeda.com/parts/SPV1050TTR/STMicroelectronics/view-part/?ref=snap, Socket=No, Table="Analog & Interface"
U4: "Single Op Amp in SOT23/5", Case=SOT23-5, Manufacturer="Analog Devices", Author=L.Karamfilov, Component Type=Standard, ComponentHeight=1.45mm, CreateDate=29/10/2018, Device=MCP6071T-E/OT, Elinvent_Num=31-5113-00, HelpURL=\\IDT-SRV102\Bulgaria\Altium\Datasheets\22142_B_MCP6071.pdf, LatestRevisionDate=29/10/2018, Manufacturer Part Number=MCP6071T-E/OT, Mounted=Yes, PackageDescription="SOT23-5, 0.95mm pitch; 5 pin, 1.60mm W X 2.90mm L X 1.45mm H body, IPC Medium", Part Description="OP AMP, 1.2MHz, 0.5V/uS, 150 uV, 5-SOT-23, Supply Voltage Range:1.8V to 6V", Part Number=MCP6071T-E/OT, Pin Count=5, SMD=Yes, Socket=No, Table="Operational Amplifiers"

## Free pads (board coordinates)
  oval 0.8x0.5 hole 3: 20(-27,-21.5) 20(-27,21.5) 20(27,-21.5) 20(27,21.5)
  round 1 smd paste-0.51 mask+0.5: Fid(-36.83,12.446) Fid(-35.75,-13) Fid(29.845,-24.638)

## Via types
v1: diameter 0.965, hole 0.508, Top Layer, Top to Bottom Layer, Bottom, tented both sides, 99 vias
v2: diameter 0.8, hole 0.4, Top Layer, Top to Bottom Layer, Bottom, tented both sides, 9 vias

## Nets (pads, with @x,y where several pads share a name; then routed paths per layer and width w, separated by ;. In a path a pad name is that pad's centre, name@x,y a point inside that pad or via, vN(x,y) a via of type N, cw(c..) or ccw(c..) an arc to the next point about the centre after c; other vN are vias at no path point)
3.3V: C1.2 C2.2 C11.2 C16.2 C20.2 IC1.8 J3.1 J4.1 J5.2 J6.1 R10.2 R13.2 R18.2 R19.2 R26.2 R27.2 R29.2 R30.2 U1.5 U2.1 U3.12 U4.5 | length 182.5
  Top Layer, Top w0.2: U3.12 -19.1,8.15 -18.15,9.1 -18.15,9.357 C11.2@-17.75,9.757
  Top Layer, Top w0.5: C2.2 3.75,3.7 4.2,3.25 v1(5.25,3.25) U2.1 ; C1.2 v1@6.3,-14.25
  Top Layer, Top w1: v1(-15,-0.5) R13.2 ; C20.2 -2.85,7.55 v1(-1.825,7.55) U4.5 ; v1(-2,-8) -1,-7 v1(7,-7) ; R30.2 v1(7.5,16.25) ; J5.2@13.364,-23.096 J5.2 ; IC1.8 IC1.8@15,15.505 ; v1(15,16.25) IC1.8@15,15.505 ; v1(18,-11) 19,-11 19.35,-10.65 R27.2 R26.2 ; R29.2 v2(18.325,16.35) 17.4,16.35 C16.2 16.655,15.605 15.1,15.605 IC1.8@15,15.505 ; R19.2 21.761,16.339 22.589,16.339 v1(22.75,16.5) ; R18.2 24.79,6.4 25.786,5.404 J6.1@27.214,5.404 ; R10.2 26.35,4.54 J6.1@27.214,5.404 ; J6.1 J6.1@27.214,5.404
  Bottom Layer, Bottom w1: v1(-2,-8) -3,-9 -13,-9 -15,-7 v1(-15,-0.5) -15,6.25 v2(-17.75,9) -4.75,9 ; v1(5.25,3.25) 3.75,3.25 -0.5,7.5 -3.25,7.5 -4.75,9 ; J4.1 5.25,16.5 5.5,16.25 ; v1(6.25,-14.25) 9.336,-11.164 ; v1(7,-7) 7,-8.828 9.336,-11.164 ; J5.2 13.46,-21.29 14.75,-20 15.75,-20 16.42,-19.33 J3.1 16.42,-13.17 15.75,-12.5 ; v1(18,-11) 17.25,-11 15.75,-12.5 ; J6.1 25.781,7.409 25.781,13.469 v1(22.75,16.5) 22.5,16.25 v1(15,16.25) v1(7.5,16.25) 5.5,16.25 ; -4.75,9 -4.75,9.5 2,16.25 5.5,16.25 ; 9.336,-11.164 14.414,-11.164 15.75,-12.5
  other v2: -18.5,10
AD1CH0: J4.5 U2.24 | length 19.1
  Top Layer, Top w0.4: U2.24 14.64,5.706 14.64,8.11 13.017,9.733 13.017,18.017 15.219,20.219 15.219,22.809 J4.5
AD1CH2: R1.2 U1.1 U2.8 | length 7.5
  Top Layer, Top w0.5: U1.1 5.975,-10.675 7.975,-10.675 R1.2 9.1,-10.65 9.75,-10 U2.8
AD1CH3: C18.2 NTC1.1 R36.1 U2.7 | length 21.9
  Top Layer, Top w0.5: NTC1.1 -7.307,1.5 -7.057,1.25 -5.75,1.25 ; -6.057,1.25 -5.2,1.25 -3.75,-0.2 C18.2 -3.475,-0.225 -0.625,-0.225 R36.1 ; v2(-1.413,-4.837) -1.332,-4.837 -1.169,-5 4,-5 4.75,-4.25 U2.7
  Bottom Layer, Bottom w0.5: v2(-1.75,-0.25) -1.75,-0.331 -1.413,-0.668 v2(-1.413,-4.837)
AD1CH11: C19.2 NTC2.1 R37.1 U2.6 | length 16
  Top Layer, Top w0.5: NTC2.1 -3.5,-2.5 R37.1 -0.4,-2.7 -0.4,-3.6 0,-4 3.25,-4 4.25,-3 U2.6
BAT_CHG: J6.4 R20.2 U2.19 | length 20.4
  Top Layer, Top w0.5: U2.19 19.683,0.663 21.459,0.663 22.399,1.603 22.399,4.712 21,6.111 21,10.607 23.393,13 26.657,13 26.757,13.1 27.29,13.1 J6.4
BAT_CON: J6.3 R23.2 U2.18 | length 19.8
  Top Layer, Top w0.5: U2.18 21.77,-0.5 23.17,0.9 23.17,4.983 22.026,6.127 22.026,10.026 22.92,10.92 23.57,10.92 R23.2 26.872,11.1 27.202,10.77 J6.3
DACOUT1: R34.2 U2.27 | length 7.2
  Top Layer, Top w0.5: R34.2 6.2,7.85 6.509,7.85 6.543,7.884 10.707,7.884 11,7.591 U2.27
GND: C1.1 C2.1 C3.1 C4.1 C5.1 C6.2 C7.1 C8.1 C9.1 C10.1 C11.1 C12.2 C13.1 C14.1 C15.1 C16.1 C18.1 C19.1 C20.1 GND.1 GND_NTC1.1 GND_NTC2.1 IC1.4 J1.2 J2.2 J2.3 J2.4 J3.3 J4.4 J4.6 J5.3 J6.2 R11.1 R12.1 R15.1 R24.1 R28.1 R33.1 R35.1 R39.1 T1.2 U1.2 U2.2 U2.14 U2.16 U2.22 U3.4 U3.6 U3.13 U3.18 U3.21 U4.2 | length 24.3
  Top Layer, Top w0.2: v2(-22.6,6.516) -22.084,6 U3.18 U3.21 ; U3.13 U3.21 ; v2(-18,3.75) -18.067,3.683 -18.983,3.683 -19.1,3.8 U3.4 U3.21@-19.1,5.6 ; v2(-16.75,4.5) -16.865,4.615 -17.115,4.615 -17.7,5.2 -18.466,5.2 -18.516,5.25 -18.75,5.25 U3.21@-19.1,5.6 ; J2.3 37.729,7.956 37.846,8.073 37.846,10.922 37.973,11.049 ; U3.21 U3.21@-19.1,5.6
  Top Layer, Top w0.381: v2(-16.75,4.5) v2@-16.637,4.5
  Top Layer, Top w0.6: C2.1 5.02,0.8 6.05,1.83 7.234,1.83 U2.2 ; U1.2 5,-8.9 5.35,-8.55 R11.1 ; IC1.4 10.43,11.595 10.43,10.57 v1(10.5,10.5)
  other v1: 8.001,-24.13 5.972,-20.355 4.318,-20.32 21.971,-19.304 6.427,-18.288 1.778,-18.161 -26.67,-17.018 2.921,-15.494 8.84,-15.113 -23.876,-14.605 -29.21,-14.478 14.732,-13.208 5.08,-9.525 0.889,-8.763 23.487,-7.714 -31.673,-6.477 21.082,-6.096 5.207,-5.715 8.255,-5.715 34.494,-5.715 36.653,-5.715 -31.673,-4.953 -11.303,-4.318 12.142,-3.429 22.429,-3.175 24.715,-3.048 -31.673,-2.921 17.349,-2.921 -22.402,-1.905 -20.751,-1.905 -31.75,-1.651 3.379,-1.27 4.649,-1.27 14.351,-0.254 -11.734,0.508 27.89,1.524 -20.243,1.778 -30.276,1.905 -11.861,2.413 24.588,2.54 13.92,2.794 -30.403,3.302 -5.525,3.824 -9.506,4.003 -3.556,4.318 30.049,4.826 35.51,4.826 37.161,4.953 -3.429,5.588 32.843,5.842 5.411,5.969 7.062,6.096 29.795,7.239 -11.049,7.493 -13.482,7.804 32.97,8.128 -21.767,8.255 29.668,9.144 -2.156,9.325 -17.961,12.02 -27.736,14.605 -24.307,14.732 -3.86,17.145 -1.701,17.145 -26.212,17.78 -23.418,17.78 -21.767,17.78 -28.879,17.907 -3.429,22.606 -1.447,22.606
  other v2: -19.5,9
NetC3_2: C3.2 R10.1 U2.17 | length 7.4
  Top Layer, Top w0.5: U2.17 19.721,-1.625 24.75,-1.625 24.75,0.331 R10.1@24.557,0.524
NetC4_2: C4.2 R16.1 U2.15 | length 8.2
  Top Layer, Top w0.5: U2.15 R16.1@25.95,-4.25 ; C4.2@25.95,-6.25 C4.2 26.075,-6.125 26.075,-4.575 R16.1
NetC5_2: C5.2 R14.1 R16.2 R17.1 | length 15.3
  Top Layer, Top w0.5: C5.2 27.925,-6.125 27.925,-4.575 R16.2 27.85,-4.45 29.15,-3.15 R14.1 29.15,2.15 31.25,4.25 R17.1
NetC6_1: C6.1 U3.3 | length 2.8
  Top Layer, Top w0.2: U3.3 -19.5,3 -19.162,2.662 -18.862,2.662 C6.1
NetC7_2: C7.2 C8.2 C9.2 R21.2 R22.2 T2.2 U3.20 | length 21.3
  Top Layer, Top w0.2: C9.2 -26.65,2.6 -26.1,3.15 -26,3.15 -25.15,4 -23.276,4 -22.076,5.2 U3.20
  Top Layer, Top w1: C9.2 -26.5,2.35 -26.5,0.45 -26.15,0.1 R22.2 -26.25,-0.1 -26.25,-1.514 -26.4,-1.664 C7.2@-26.4,-2.5 ; C8.2 C8.2@-26.25,-5.5 ; C7.2@-26.25,-2.5 C8.2@-26.25,-5.5 ; T2.2 -22.95,-5.5 R21.2@-22.95,-5.1 ; R21.2 R21.2@-22.95,-5.1 ; C8.2@-26.25,-5.5 -23.35,-5.5 R21.2@-22.95,-5.1
NetC10_2: C10.2 U3.11 | length 4.4
  Top Layer, Top w0.2: U3.11 -16.75,7.5 -16.4,7.85 -16.4,9.642 C10.2@-16.25,9.792
NetC12_1: C12.1 U3.14 | length 13.9
  Top Layer, Top w0.2: v1(-20.25,10.25) -20.25,8.76 -19.9,8.41 U3.14
  Bottom Layer, Bottom w0.8: v1(-20.25,10.25) -20.25,16.9 C12.1@-17.15,20
NetC13_2: C13.2 C14.2 C15.2 R31.2 U3.15 | length 22.8
  Top Layer, Top w0.2: C14.2@-21.8,13.05 -21.8,9.693 -20.3,8.193 U3.15
  Top Layer, Top w0.6: C15.2 C15.2@-28.95,13
  Top Layer, Top w1: C15.2 C13.2 -21.8,13.05 -21.388,13.462 -15.036,13.462 -14.45,12.876 -14.45,11.5 -14.38,11.43 R31.2@-14.25,11.43
NetC17_1: C17.1 R38.1 R39.2 U4.4 | length 10.1
  Top Layer, Top w0.5: R39.2 -1.15,10.95 -0.8,10.6 U4.4 -0.75,9.4 0.1,9.4 0.5,9 0.5,6.75 -0.6,5.65 C17.1
NetC17_2: C17.2 R36.2 R37.2 R38.2 U4.1 | length 10.3
  Top Layer, Top w0.5: R37.2 R36.2 C17.2 R38.2 1.1,5.86 1.74,6.5 1.74,7.5 1.79,7.55 U4.1
NetIC1_3: IC1.3 R30.1 | length 3
  Top Layer, Top w0.4: R30.1 7.55,13.65 7.8,13.4 7.8,13.35 8.285,12.865 IC1.3
NetIC1_7: IC1.7 R29.1 | length 4.8
  Top Layer, Top w0.5: IC1.7 18.885,14.135 R29.1@19.25,14.5 ; R29.1 19.28,14.65 R29.1@19.493,14.863
NetIN_1: IN.1 R3.1 R4.1 R5.1 R6.1 R7.1 R8.1 R9.1 T2.3 | length 26.1
  Top Layer, Top w1.6: IN.1 -19,-10 -18.5,-10.5 -17.5,-10.5 -2.5,-10.5 -0.659,-10.5 -0.623,-10.464
NetJ1_1: J1.1 R14.2 | length 3.7
  Top Layer, Top w0.5: R14.2 J1.1
NetJ2_1: J2.1 R17.2 | length 3.3
  Top Layer, Top w0.5: R17.2 31.325,9.425 34.4,9.425 J2.1@34.475,9.5
NetL1_1: L1.1 U3.19 | length 5.7
  Top Layer, Top w0.2: -23.088,5.6 U3.19
  Top Layer, Top w0.8: L1.1 -23.717,6.2 -23.249,5.731 -23.22,5.731 -23.088,5.6
NetL1_2: L1.2 U3.16 | length 6.7
  Top Layer, Top w0.2: -23,7.5 -22.5,7.5 -21.8,6.8 U3.16
  Top Layer, Top w0.8: L1.2 -25.3,9.8 -23,7.5
NetR1_1: R1.1 R2.2 U1.4 | length 7.2
  Top Layer, Top w0.5: R2.2 2,-13.4 4,-13.4 4.05,-13.35 U1.4 4.05,-13.05 4.454,-12.646 4.454,-12.296 4.75,-12 7,-12 7.15,-12.15 7.8,-12.15 R1.1
NetR2_1: R2.1 R3.2 R4.2 R5.2 R6.2 R7.2 R8.2 T1.3 | length 25.9
  Top Layer, Top w1.6: R8.2 R7.2 R4.2 R6.2 R3.2 R5.2 0.05,-13.45 R2.1 0.1,-14.975 -0.25,-15.325 -0.25,-18.525 -2.225,-20.5 T1.3
NetR9_2: R9.2 R11.2 U1.3 | length 4.7
  Top Layer, Top w0.5: R9.2 2,-10.6 4,-10.6 U1.3@4.05,-10.65 ; R11.2 3.5,-8.65 3.5,-9.9 4.05,-10.45 U1.3@4.05,-10.65 ; U1.3 U1.3@4.05,-10.65
NetR13_1: R13.1 R15.2 U3.5 | length 4.8
  Top Layer, Top w0.2: U3.5 -17.75,4.5 -16.75,3.5 R15.2 R13.1@-15.5,2.35
NetR18_1: R18.1 R23.1 U3.8 | length 53.5
  Top Layer, Top w0.2: U3.8 -13.184,6
  Top Layer, Top w0.5: -13.184,6 -11,6 -3.5,13.5 v1(3.25,13.5) ; R18.1@23.75,7.85 R23.1 23.815,9.336 24.534,9.336 v1(24.598,9.271)
  Bottom Layer, Bottom w0.5: v1(3.25,13.5) 8.5,13.5 9,13 14.5,13 16.25,14.75 22.5,14.75 24.765,12.485 24.765,11.024 24.598,10.858 v1(24.598,9.271)
NetR19_1: R19.1 R20.1 U3.7 | length 47.7
  Top Layer, Top w0.2: U3.7 -14.1,5.6 -13.8,5.3 -12.75,5.3
  Top Layer, Top w0.5: -12.75,5.3 -10.45,5.3 -3.177,12.573 2.677,12.573 v1(3.25,12) ; v1(21.5,13) 21.75,13.25 R19.1 21.775,14.625 23.725,14.625 R20.1
  Bottom Layer, Bottom w0.5: v1(3.25,12) 15,12 16.75,13.75 20.75,13.75 v1(21.5,13)
NetR21_1: R21.1 R24.2 T2.1 | length 4.6
  Top Layer, Top w0.6: T2.1 -21.075,-7.325 -21.075,-5.075 R21.1 R24.2
NetR22_1: R22.1 R25.2 U3.1 | length 7
  Top Layer, Top w0.2: R22.1@-24.4,0.2 R25.2 -24.4,2.1 -23,3.5 -22.945,3.5 -21.945,4.5 U3.1
NetR25_1: R25.1 R28.2 U3.2 | length 6.3
  Top Layer, Top w0.2: R28.2@-22.5,0.1 -22.6,0 R25.1 -22.6,2.1 -21.7,3 -20.75,3 -19.9,3.85 U3.2
NetR31_1: R31.1 R32.2 U3.10 | length 7.3
  Top Layer, Top w0.2: U3.10 -16.975,6.8 -16.25,6.8 -14.5,8.55 R31.1@-14.5,9.663
  Top Layer, Top w0.6: R31.1 R32.2
NetR32_1: R32.1 R33.2 U3.9 | length 12.8
  Top Layer, Top w0.2: U3.9 -15.525,6.4 -14.94,6.985 -12.765,6.985 -11,8.75 -11,11.134 -11.266,11.4
  Top Layer, Top w0.6: R32.1@-12,11.55 -11.5,11.55 -11.617,11.4 -11.016,11.4 R33.2@-10.25,11.4
NetR34_1: R34.1 R35.2 U4.3 | length 4.2
  Top Layer, Top w0.5: U4.3 2.05,9.45 2.15,9.35 R34.1
PWR_WKP: J3.2 U2.23 | length 23
  Top Layer, Top w0.5: v1(15.75,-3.25) 16,-3 U2.23
  Bottom Layer, Bottom w0.5: v1(15.75,-3.25) 18.96,-6.46 J3.2
SCL: J3.5 R26.1 U2.13 | length 19.6
  Top Layer, Top w0.5: U2.13 16,-8.5 17,-9.5 23.75,-9.5 24.5,-10.25 24.5,-12 24.15,-12.35 R26.1@23.05,-12.35 ; R26.1 R26.1@23.05,-12.35 ; J3.5 26.58,-15.88 R26.1@23.05,-12.35
SDA: J3.4 R27.1 U2.12 | length 16.6
  Top Layer, Top w0.5: U2.12 14.75,-10.25 16.85,-12.35 R27.1 21,-13.5 22.25,-14.75 23.747,-14.75 23.849,-14.852 23.849,-15.809 J3.4
"SPI2 CS": IC1.1 U2.25 | length 12.2
  Top Layer, Top w0.4: IC1.1 11.845,15.405 12.404,14.846 12.404,9.495 13.5,8.399 U2.25
"SPI2 MISO": IC1.2 U2.26 | length 10.2
  Top Layer, Top w0.4: IC1.2 10.11,14.125 11.375,14.125 11.804,13.696 11.804,8.766 12.237,8.333 U2.26@12.237,5.609
"SPI2 MOSI": IC1.5 U2.5 | length 19.3
  Top Layer, Top w0.5: U2.5 10.75,-1.75 11.75,-0.75 v1(11.75,0) ; IC1.5 14.954,11.595 15,11.549 v1(15,10.25)
  Bottom Layer, Bottom w0.5: v1(11.75,0) 11.75,8.25 13.75,10.25 v1(15,10.25)
"SPI2 SCK": IC1.6 U2.20 | length 15.9
  Top Layer, Top w0.5: IC1.6 14.919,12.846 15.904,12.846 20.25,8.5 20.25,5.584 21.55,4.284 21.55,2.42 21.257,2.127 19.723,2.127 U2.20
STRT_MEAS: R12.2 T1.1 U2.11 | length 22.8
  Top Layer, Top w0.5: T1.1 6.72,-22.78 8,-21.5 R12.2 10.15,-19.85 10.775,-19.225 10.775,-17.125 13.5,-14.4 U2.11
SWCLK: J4.3 U2.4 | length 30.6
  Top Layer, Top w0.4: v1(9.962,9.288) 9.854,9.397 9.384,9.397 5.75,13.03 5.75,18.42 J4.3
  Top Layer, Top w0.5: U2.4 v1(10,-0.5)
  Bottom Layer, Bottom w0.5: v1(9.962,9.288) 10.051,9.199 10.051,8.14 10.683,7.508 10.683,0.308 10,-0.374 v1(10,-0.5)
SWDIO: J4.2 U2.3 | length 27.4
  Top Layer, Top w0.4: J4.2 7.715,22.925 7.715,21.715 5.15,19.15 5.15,12.619 7.786,9.984 7.786,9.542 v1(7.894,9.434)
  Top Layer, Top w0.5: U2.3 9.457,0.75 9.661,0.954 9.661,1.411 v1(9.75,1.5)
  Bottom Layer, Bottom w0.5: v1(7.894,9.434) 9.019,8.309 9.019,8.18 9.75,7.448 v1(9.75,1.5)
TIM1CH2: J4.7 U2.21 | length 21.8
  Top Layer, Top w0.5: v1(17.75,9) 17.876,9 18.522,8.354 18.646,8.354 19,8 19,5.844 19.596,5.248 U2.21 ; v1(19.25,11.25) 19.25,12.813 20.5,14.063 20.5,22.99 J4.7
  Bottom Layer, Bottom w0.5: v1(17.75,9) 19.161,10.411 19.161,11.161 v1(19.25,11.25)
U1_RX: J5.4 U2.9 | length 21
  Top Layer, Top w0.5: U2.9 11,-14 v1(11.25,-14.25) ; v1(12.5,-18) 14.5,-20 17,-20 18.5,-21.5 18.5,-22.96 J5.4
  Bottom Layer, Bottom w0.5: v1(11.25,-14.25) 11.25,-16.75 v1(12.5,-18)
U1_TX: J5.5 U2.10 | length 22.4
  Top Layer, Top w0.5: v1(12.25,-12.75) U2.10 ; v1(14.25,-17.25) 14.339,-17.339 14.339,-18.339 15,-19 18.75,-19 21.08,-21.33 J5.5
  Bottom Layer, Bottom w0.5: v1(12.25,-12.75) 12.25,-15.5 14,-17.25 v1(14.25,-17.25)
pads on no net: J5.1 U2.28 U3.17

## Polygon pours and split planes (outlines as drawn)
GND on Bottom Layer, Bottom "NONET_L-01_P-001" (solid, pour order 1): -34,13 -30,13 -30,19 -23,19 -23,25 24,25 24,18 30,18 30,15 31,14 38,14 38,-14 30,-14 30,-18 24,-18 24,-25 -24,-25 -24,-18 -30,-18 -30,-13 -34,-13
3.3V on Bottom Layer, Bottom "NONET_L-01_P-001" (solid, pour order 0): -18.75,11.25 -18.75,8.5 -17.75,7.5 -16.25,7.5 -16.25,10.75 -16.75,11.25
GND on Top Layer, Top "NONET_L-01_P-001" (solid, remove dead copper, pour order 3): -34,13 -30,13 -30,19 -23,19 -23,25 24,25 24,18 30,18 30,15 31,14 38.354,14 38.354,-14 30,-14 30,-18 24,-18 24,-25 -24,-25 -24,-18 -30,-18 -30,-13 -34,-13
NetR2_1 on Top Layer, Top "NONET_L-01_P-001" (solid, pour order 2): 0,-13 0,-23 -2,-25 -24,-25 -24,-18 -19,-13 -15,-13

## Keep-outs
Keep-Out Layer, Board:
  lines w0.3: -39,-15 -39,15 -31.5,15 -31.5,26 31.5,26 31.5,15 39,15 39,-15 31.5,-15 31.5,-26 -31.5,-26 ; -39,-15 -31.5,-15 ; -39,-15 -31.5,-15 ; -31.5,-26 -31.5,-15 ; -31.5,-26 -31.5,-15

## Other copper
Top Layer, Top:
  pour cut-out: -36.821,11.453 -36.919,11.453 -37.113,11.491 -37.295,11.567 -37.458,11.676 -37.598,11.816 -37.707,11.979 -37.783,12.161 -37.821,12.355 -37.821,12.453 -37.821,12.552 -37.783,12.745 -37.707,12.927 -37.598,13.091 -37.458,13.23 -37.295,13.339 -37.113,13.415 -36.919,13.453 -36.821,13.453 -36.722,13.453 -36.529,13.415 -36.347,13.339 -36.183,13.23 -36.044,13.091 -35.935,12.927 -35.859,12.745 -35.821,12.552 -35.821,12.453 -35.821,12.355 -35.859,12.161 -35.935,11.979 -36.044,11.816 -36.183,11.676 -36.347,11.567 -36.529,11.491 -36.722,11.453 -36.821,11.453
  pour cut-out: 29.854,-25.631 29.756,-25.631 29.562,-25.593 29.38,-25.517 29.217,-25.408 29.077,-25.268 28.968,-25.105 28.892,-24.923 28.854,-24.729 28.854,-24.631 28.854,-24.532 28.892,-24.339 28.968,-24.157 29.077,-23.993 29.217,-23.854 29.38,-23.745 29.562,-23.669 29.756,-23.631 29.854,-23.631 29.953,-23.631 30.146,-23.669 30.328,-23.745 30.492,-23.854 30.631,-23.993 30.74,-24.157 30.816,-24.339 30.854,-24.532 30.854,-24.631 30.854,-24.729 30.816,-24.923 30.74,-25.105 30.631,-25.268 30.492,-25.408 30.328,-25.517 30.146,-25.593 29.953,-25.631 29.854,-25.631
  pour cut-out: -35.741,-13.993 -35.839,-13.993 -36.033,-13.955 -36.215,-13.879 -36.378,-13.77 -36.518,-13.63 -36.627,-13.467 -36.703,-13.285 -36.741,-13.091 -36.741,-12.993 -36.741,-12.894 -36.703,-12.701 -36.627,-12.519 -36.518,-12.355 -36.378,-12.216 -36.215,-12.107 -36.033,-12.031 -35.839,-11.993 -35.741,-11.993 -35.642,-11.993 -35.449,-12.031 -35.267,-12.107 -35.103,-12.216 -34.964,-12.355 -34.855,-12.519 -34.779,-12.701 -34.741,-12.894 -34.741,-12.993 -34.741,-13.091 -34.779,-13.285 -34.855,-13.467 -34.964,-13.63 -35.103,-13.77 -35.267,-13.879 -35.449,-13.955 -35.642,-13.993 -35.741,-13.993
  pour cut-out: 36.322,-1.778 36.83,-2.286 38.608,-2.286 38.608,1.778 38.481,1.905 36.195,1.905
  pour cut-out: 31.75,-2.54 37.211,-2.54 37.211,1.397 36.83,1.778 31.75,1.778
  pour cut-out: -28.575,11.176 -29.337,10.414 -29.337,5.08 -28.575,4.318 -24.257,4.318 -23.114,5.461 -23.114,9.906 -24.384,11.176
  pour cut-out: -17.78,-10.922 -17.78,-12.954 4.318,-12.954 4.445,-12.827 4.445,-10.922 -19.685,-10.922
  pour cut-out: -9.652,4.028 -9.652,-0.762 -4.699,-0.762 -4.699,4.064 -9.641,4.064
  pour cut-out: -9.652,-0.145 -9.652,-4.935 -4.699,-4.935 -4.699,-0.109 -9.641,-0.109
  pour cut-out: -28.956,-7.402 -28.956,-12.192 -24.003,-12.192 -24.003,-7.366 -28.945,-7.366

## Silkscreen, mask and mechanical layers (free items; w line width, h text height)
Top Overlay, Top Silk:
  circle w0.305: c-27,-21.5 r2.3
  circle w0.305: c27,-21.5 r2.3
  circle w0.305: c27,21.5 r2.3
  circle w0.305: c-27,21.5 r2.3
Top Solder, Top Mask:
  rectangle: -20,-23 -8,-18
TOP ASSY:
  text "'.VariantName'" at -33.35,43.725 h3
ZP90.60.40.U:
  lines w0.3: -27,-21.5 27,21.5 -27,21.5 27,-21.5
Mechanical 10:
  circle w0.2: c-99.429,-182.665 r2.25
  circle w0.2: c-99.429,-182.665 r1